# Altium PCB UKU205.PcbDoc (part 3 of 3)
Units mm, origin at the board's own origin, x right, y up, seen from the top; angles counter-clockwise.
Board outline 374.65 x 264.35 mm, 2 copper layers (Top Layer, Bottom Layer); 253 components, 433 nets, 927 pads, 929 vias.
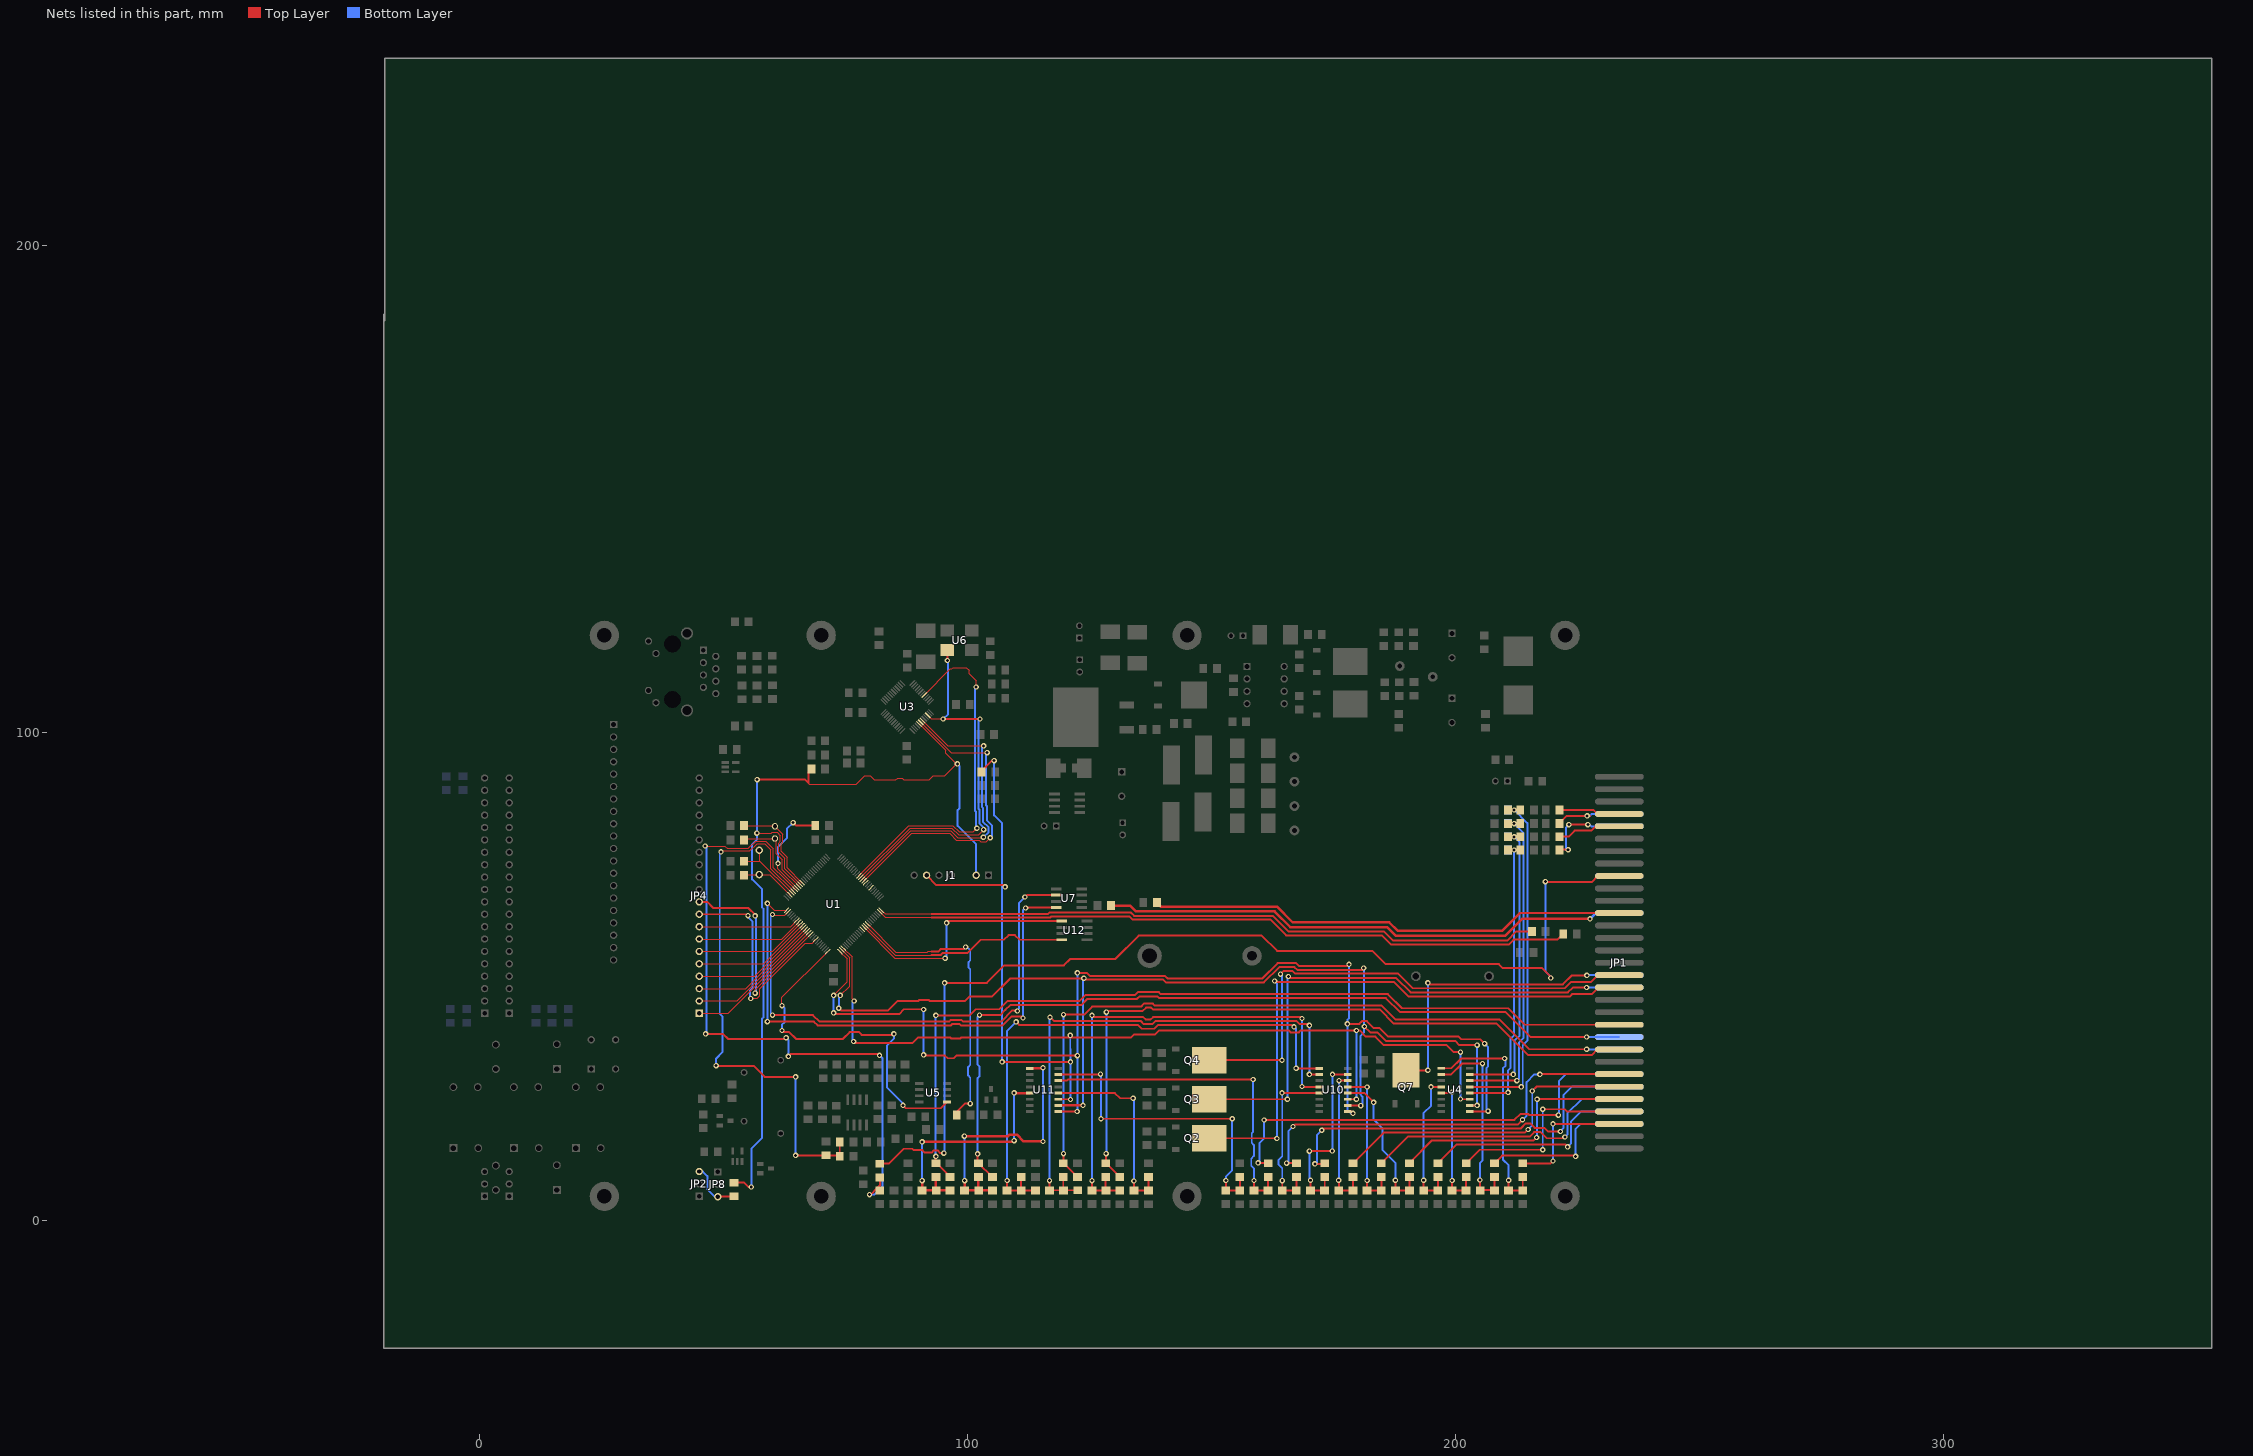
[diagram p3: the nets of this part, all layers, seen from the top]

## Via types
v1: diameter 1.1, hole 0.6, Top Layer to Bottom Layer, 928 vias
v2: diameter 3, hole 2, Top Layer to Bottom Layer, 1 vias

## Nets (pads, with @x,y where several pads share a name; then routed paths per layer and width w, separated by ;. In a path a pad name is that pad's centre, name@x,y a point inside that pad or via, vN(x,y) a via of type N, cw(c..) or ccw(c..) an arc to the next point about the centre after c; other vN are vias at no path point) (continued)
P1_14: U1.89 U3.41 | length 74.3
  Top Layer w0.25: U1.89@77.727,70.734 87.993,81 97,81 98.3,79.7 101.15,79.7 v1(101.9,80.45) ; U3.41@91.12,107.733 96.486,113.1 96.8,113.1 97.1,113.4 99.75,113.4 100.3,112.85 100.3,112.1 101.75,110.65 v1(101.75,109.4)
  Bottom Layer w0.4: v1(101.75,109.4) 101.5,109.15 101.5,84.05 101.7,83.85 101.7,80.65 v1(101.9,80.45)
P1_15: U1.88 U3.34 U6.3 | length 79.1
  Top Layer w0.25: U1.88@78.08,70.38 88.2,80.5 96.75,80.5 98.15,79.1 102.25,79.1 v1(103.3,80.15) ; U3.34@91.827,103.597 92.573,102.85 v1(95,102.85)
  Top Layer w0.4: v1@95.031,102.881 v1@102.481,102.881 ; v1(95.85,114.85) U6.3@95.85,116.9
  Bottom Layer w0.4: v1(95,102.85) 96,103.85 v1@96,114.85 ; v1(102.55,102.85) 102.25,102.55 102.25,84.4 102.4,84.25 102.4,81.5 103.3,80.6 v1(103.3,80.15)
P1_16: U1.87 U3.31 | length 64.1
  Top Layer w0.25: U1.87@78.434,70.026 88.357,79.95 96.55,79.95 97.95,78.55 103.2,78.55 v1(103.25,78.6) ; U3.31@90.766,102.536 95.952,97.35 v1(103.3,97.35)
  Bottom Layer w0.4: v1(103.25,78.6) 104.3,79.65 104.3,80.65 103.15,81.8 103.15,84.65 103,84.8 103,97.05 v1(103.3,97.35)
P1_17: U1.86 U3.30 | length 65.4
  Top Layer w0.25: U1.86@78.787,69.673 88.514,79.4 96.3,79.4 97.7,78 102.4,78 102.75,77.65 103.8,77.65 v1(104.65,78.5) ; U3.30@90.413,102.183 96.645,95.95 v1(104,95.95)
  Bottom Layer w0.4: v1(104,95.95) 103.75,95.7 103.75,85.2 103.95,85 103.95,82.05 105.05,80.95 105.05,78.9 v1(104.65,78.5)
P1_18: JP4.8 U1.32 | length 20.5
  Top Layer w0.25: JP4.8@45,60.28 63.737,60.28 U1.32@64.999,61.541
P1_19: JP4.7 U1.33 | length 21.8
  Top Layer w0.25: JP4.7@45,57.74 61.904,57.74 U1.33@65.352,61.188
P1_20: JP4.6 U1.34 | length 23
  Top Layer w0.25: JP4.6@45,55.2 60.072,55.2 U1.34@65.706,60.834
P1_21: JP4.5 U1.35 | length 24.3
  Top Layer w0.25: JP4.5@45,52.66 58.239,52.66 U1.35@66.059,60.481
P1_22: JP4.4 U1.36 | length 25.6
  Top Layer w0.25: JP4.4@45,50.12 56.406,50.12 U1.36@66.413,60.127
P1_23: JP4.3 U1.37 | length 26.8
  Top Layer w0.25: JP4.3@45,47.58 54.573,47.58 U1.37@66.766,59.773
P1_24: JP4.2 U1.38 | length 28.1
  Top Layer w0.25: JP4.2@45,45.04 52.74,45.04 U1.38@67.12,59.42
P1_25: JP4.1 U1.39 | length 29.3
  Top Layer w0.25: JP4.1@45,42.5 50.907,42.5 U1.39@67.473,59.066
P1_26: JP4.10 U1.40 | length 45.6
  Top Layer w0.25: v1(56.45,46.65) 56.45,47.336 U1.40@67.827,58.713 U1.40@67.827,58.677
  Top Layer w0.4: JP4.10@45,65.36 46.64,65.36 47.9,64.1 55.05,64.1 56.45,62.7 v1(56.45,62.5)
  Bottom Layer w0.4: v1(56.45,46.65) 56.65,46.85 56.65,62.3 v1(56.45,62.5)
P1_27: JP4.9 U1.43 | length 46.9
  Top Layer w0.25: v1(55.55,45.55) 55.65,45.65 56.9,45.65 57.4,46.15 57.4,47.55 66.75,56.9 68.136,56.9 U1.43@68.888,57.652
  Top Layer w0.4: JP4.9@45,62.82 54.73,62.82 v1(55,62.55)
  Bottom Layer w0.4: v1(55,62.55) 55,62.25 55.9,61.35 55.9,47.6 55.4,47.1 55.4,45.7 v1(55.55,45.55)
P1_30: C25.2 R66.2 R67.1 U1.21 | length 111.6
  Top Layer w0.25: v1(49.45,75.6) 49.65,75.8 55.4,75.8 56.85,77.25 58.45,77.25 59.7,76 59.7,72.143 U1.21@64.243,67.6
  Top Layer w0.4: v1(48.45,31.8) 48.5,31.75 56.15,31.75 58.4,29.5 v1(64.75,29.5) ; v1(64.75,13.4) 64.8,13.4 64.812,13.412 73.738,13.412 73.8,13.475 R66.2@73.8,16.2
  Bottom Layer w0.4: v1(48.45,31.8) 48.45,33.25 49.8,34.6 49.8,41.85 49.2,42.45 49.2,75.35 v1(49.45,75.6) ; v1(64.75,13.4) v1(64.75,29.5)
P1_31: R16.1 R25.1 U1.20 | length 139.4
  Top Layer w0.25: v1(46.2,76.8) 50.2,76.8 50.7,76.3 55.05,76.3 56.55,77.8 58.6,77.8 60.2,76.2 60.2,72.35 62.195,70.355 U1.20@64.645,67.905
  Top Layer w0.4: v1(46.3,38.3) 49.85,38.3 50.9,37.25 62.55,37.25 v1(62.8,37.5) ; v1(63.25,33.7) 63.75,34.2 81.65,34.2 v1(81.95,33.9) ; v1(79.9,5.35) 80.107,5.35 81.481,6.725 82.007,7.25 R25.1@82.007,8.888
  Bottom Layer w0.4: v1(46.2,76.8) 46.45,76.55 46.45,38.45 v1(46.3,38.3) ; v1(62.8,37.5) 63.25,37.05 v1(63.25,33.7) ; v1(79.9,5.35) 80.9,5.35 82.6,7.05 82.6,33.25 v1(81.95,33.9)
P2_0: R54.1 U1.75 | length 137
  Top Layer w0.25: U1.75@82.323,63.663 83.085,62.9 92.6,62.9
  Top Layer w0.4: 92.6,62.9 116.5,62.9 116.75,63.15 133.5,63.15 134.15,62.5 162.55,62.5 165.75,59.3 185.35,59.3 187.25,57.4 210.6,57.4 212.493,59.293 R54.1@215.688,59.293
P2_1: R55.1 U1.74 | length 144
  Top Layer w0.25: U1.74@81.969,63.309 83.078,62.2 92.65,62.2
  Top Layer w0.4: 92.65,62.2 117,62.2 117.2,62.4 133.15,62.4 133.85,61.7 162.1,61.7 165.3,58.5 184.9,58.5 186.8,56.6 210.95,56.6 211.95,57.6 220.894,57.6 R55.1@222.088,58.793
P2_6: R34.1 U1.67 | length 60.4
  Top Layer w0.25: U1.67@79.494,60.834 85.278,55.05 91.75,55.05 91.9,55.2 92.65,55.2
  Top Layer w0.4: 92.65,55.2 94.05,55.2 94.55,55.7 99.25,55.7 v1@99.75,56.2 ; R34.1@97.788,21.693 97.788,22.338 99.45,24 v1(100.55,24)
  Bottom Layer w0.4: v1@99.75,56.2 100.55,55.4 100.55,53.35 100.2,53 100.2,51.85 100.55,51.5 100.55,31.95 100.1,31.5 100.1,29.8 100.55,29.35 v1(100.55,24)
  other v1: 99.6,56.1
P2_7: U1.66 U12.4 | length 44.7
  Top Layer w0.25: U1.66@79.141,60.481 85.171,54.45 92.6,54.45 ; U1.66@79.15,60.5 U1.66@79.155,60.495
  Top Layer w0.4: 92.6,54.45 94.45,54.45 94.9,54.9 100,54.9 102.692,57.592 107.442,57.592 108.4,58.55 109.7,58.55 110.658,57.592 U12.4@119.289,57.592
P2_8: U1.65 U12.1 | length 50.4
  Top Layer w0.25: U1.65@78.773,60.127 U1.65@78.787,60.127 85.114,53.8 v1(95.4,53.8)
  Top Layer w0.4: v1(95.7,61.05) 95.7,61.15 95.952,61.402 U12.1@119.289,61.402
  Bottom Layer w0.4: v1(95.4,53.8) 95.45,53.8 95.7,54.05 v1(95.7,61.05)
P2_9: U1.64
P2_10: J1.6 R82.2 U1.53 U4.11 U10.11 U11.11 | length 289
  Top Layer w0.25: U1.53@74.545,55.884 76.35,54.079 76.35,45.45 v1(76.75,45.05)
  Top Layer w0.4: v1(76.65,36.75) 76.95,36.45 88.75,36.45 89.9,37.6 96.45,37.6 96.7,37.35 98.5,37.35 98.75,37.6 133.55,37.6 134.1,38.15 138.4,38.15 139.25,39 165.8,39 166.2,38.6 167.9,38.6 168.3,39 180.4,39 181.65,37.75 183.6,37.75 185.35,36 198.2,36 199.65,34.55 v1(201.05,34.55) ; J1.6@91.6,70.808 93.608,68.8 107.35,68.8 v1(107.7,68.45) ; R82.2@102.784,92.084 105,94.3 v1(105.45,94.3) ; v1(107.1,32.55) v1(121.1,32.55) ; U11.11@118.625,24.895 v1@121.055,24.895 ; U10.11@177.925,24.895 179.695,24.895 v1(179.7,24.9) ; v1(201.05,24.95) 201.098,24.902 U4.11@202.92,24.902
  Bottom Layer w0.4: v1(76.65,36.75) 76.4,37 76.4,44.7 v1(76.75,45.05) ; v1(105.45,94.3) 105.45,83.1 107.1,81.45 v1(107.1,32.55) ; 107.1,68.8 107.35,68.8 v1(107.7,68.45) ; v1(121.05,38) 121.071,32.55 v1(121.1,24.85) ; v1(179.7,24.9) v1(179.7,39) ; v1(201.05,24.95) v1(201.05,34.55)
P2_11: U1.52 U4.10 U10.10 U11.10 | length 227.3
  Top Layer w0.25: v1(73.9,46.2) 75.8,48.1 75.8,53.922 U1.52@74.191,55.531
  Top Layer w0.4: v1(73.6,43.55) 74.05,43.1 83.7,43.1 85.6,45 89.85,45 90.05,45.2 92.05,45.2 92.25,45 99.45,45 100.45,46 105.05,46 108.7,49.65 123.5,49.65 123.75,49.4 140.1,49.4 140.65,48.85 160.75,48.85 163.9,52 167,52 167.6,51.4 181,51.4 v1@181.25,51.65 ; U10.10@177.95,23.65 178,23.6 v1(180.6,23.6) ; v1(181.35,39.8) 182.55,38.6 184,38.6 185.75,36.85 199.95,36.85 200.8,36 v1(204.45,36) ; U4.10@202.92,23.632 204.432,23.632 v1(204.45,23.65)
  Top Layer w0.5: U11.10@118.625,23.625 123.625,23.625 v1(123.65,23.65)
  Bottom Layer w0.4: v1(73.6,43.55) 73.6,45.9 v1(73.9,46.2) ; v1(123.65,23.65) 123.65,49.5 v1(123.85,49.7) ; v1(180.6,23.6) 180.95,23.95 180.95,25.45 180.5,25.9 180.5,37.85 180.607,37.957 181.234,38.584 v1@181.234,51.65 ; v1(204.45,23.65) v1(204.45,36)
  other v1: 181.2,51.8
P2_12: U1.51 U4.9 U10.9 U11.9 | length 245.9
  Top Layer w0.25: v1(72.55,46.2) 75.3,48.95 75.3,53.715 U1.51@73.837,55.177
  Top Layer w0.4: v1(72.55,42.6) 72.8,42.35 85.95,42.35 86.95,43.35 90.95,43.35 v1(91,43.3) ; v1(91,34) 91.15,33.85 95.35,33.85 95.9,33.3 97.15,33.3 97.7,33.85 v1(122.5,33.85) ; U11.9@118.625,22.35 v1@122.4,22.35 ; v1(122.5,50.8) 124.45,50.8 125.1,50.15 140.5,50.15 141,49.65 160.4,49.65 163.55,52.8 167.35,52.8 167.95,52.2 177.85,52.2 v1(178.2,52.55) ; v1(177.85,40.35) 180.3,40.35 180.85,40.9 181.85,40.9 183.25,39.5 184.45,39.5 186.2,37.75 200.65,37.75 201.2,37.2 205.1,37.2 v1(206,36.3) ; U10.9@177.925,22.355 178.645,22.355 v1(179,22) ; U4.9@202.92,22.362 206.612,22.362 v1(206.7,22.45)
  Bottom Layer w0.4: v1(72.55,42.6) v1(72.55,46.2) ; v1(91,34) v1(91,43.3) ; v1@122.5,22.45 v1(122.5,50.8) ; 178.2,41.4 v1(178.2,52.55) ; 178.2,41.5 177.85,41.15 177.85,22.7 178.55,22 v1(179,22) ; v1(206,36.3) 206.7,35.6 206.7,31.65 206.35,31.3 206.35,22.8 v1(206.7,22.45)
  other v1: 122.45,22.4
P2_13: U1.50 U5.1 | length 71.5
  Top Layer w0.25: v1(61.95,44.1) 61.95,45.765 U1.50@71.363,55.177
  Top Layer w0.4: v1(61.95,39) 62,39 62.35,38.65 63.45,38.65 64.85,37.25 74.4,37.25 75.8,38.65 77.75,38.65 78.3,38.1 84.7,38.1 v1(84.9,38.3) ; v1(86.75,23.65) 87.35,23.05 94.506,23.05 U5.1@95.796,24.34
  Bottom Layer w0.4: v1(61.95,39) 61.95,40.15 62.5,40.7 62.5,43.55 v1(61.95,44.1) ; v1(84.9,38.3) 84.9,37.3 83.45,35.85 83.45,27.35 86.75,24.05 v1(86.75,23.65)
P3_25: U1.27 U7.2 | length 107.1
  Top Layer w0.25: v1@59.95,62.85 60.2,62.6 62.522,62.6 U1.27@63.231,63.309
  Top Layer w0.4: v1@59.9,42.15 68.3,42.15 69.65,40.8 96.2,40.8 96.55,41.15 98.75,41.15 99.1,40.8 106.9,40.8 109.2,43.1 110.05,43.1 v1@110.2,43.25 ; v1(111.75,66.35) 112.132,66.732 U7.2@118.189,66.732
  Bottom Layer w0.4: v1@59.9,42.15 59.65,42.4 59.65,62.55 v1@59.95,62.85 ; v1@110.2,43.25 110.55,43.6 110.55,65.15 v1(111.75,66.35)
  other v1: 60,42.15 110.2,43 60.021,62.779
P3_26: U1.26 U7.4 | length 111.8
  Top Layer w0.25: v1(58.95,65.05) 60.337,63.663 U1.26@62.877,63.663
  Top Layer w0.4: v1(58.95,40.8) 68.5,40.8 69.25,40.05 96.6,40.05 96.9,40.35 98.3,40.35 98.6,40.05 107.2,40.05 109.05,41.9 111,41.9 v1(111.35,41.55) ; v1(111.9,64.1) 111.992,64.192 U7.4@118.189,64.192
  Bottom Layer w0.4: v1(58.95,40.8) v1(58.95,65.05) ; v1(111.35,41.55) 111.35,63.65 111.8,64.1 v1(111.9,64.1)
P4_28: U1.82
P4_29: U1.85
PROG_RESET: 
PROG_SET: 
PWM1: JP1.23 R40.1 | length 98.7
  Top Layer w0.5: R40.1@138.812,65.207 139.619,64.4 163.4,64.4 166.65,61.15 186.45,61.15 188.2,59.4 209.55,59.4 213.225,63.075 JP1.23@233.589,63.075
PWM2: JP1.24 R41.1 | length 108.8
  Top Layer w0.5: R41.1@129.412,64.607 133.293,64.607 134.5,63.4 162.95,63.4 166.15,60.2 186,60.2 187.8,58.4 210.2,58.4 213.675,61.875 v1(227.589,61.875)
  Bottom Layer w0.5: v1(227.589,61.875) 228.814,63.099 JP1.24@233.679,63.099
R1: JP1.35 Q2.4 | length 119.2
  Top Layer w0.4: Q2.4@149.521,16.903 149.524,16.9 163.4,16.9 163.45,16.85 v1(163.4,16.85) ; v1(162.95,49.15) 163,49.1 163.05,49.1 163.25,48.9 187.45,48.9 190.4,45.95 223.45,45.95 224,46.5 228.05,46.5 229.375,47.825 JP1.35@233.589,47.825
  Bottom Layer w0.4: v1(162.95,49.15) 163.4,48.7 v1(163.4,16.85)
R2: JP1.36 Q3.4 | length 111.3
  Top Layer w0.4: Q3.4@149.521,24.903 157.597,24.903 157.6,24.9 v1(165.55,24.9) ; v1(165.75,50.05) 166.05,49.75 187.85,49.75 190.8,46.8 223.05,46.8 224.05,47.8 v1(226.9,47.8)
  Bottom Layer w0.4: v1(165.55,24.9) v1@165.55,50.05 ; v1@165.55,50.25 v1(165.75,50.05) v1@165.75,50.3 ; v1(226.9,47.8) 226.925,47.825 JP1.36@233.589,47.825
R3: JP1.33 Q4.4 | length 105.3
  Top Layer w0.4: Q4.4@149.521,32.903 156.547,32.903 156.55,32.9 v1(164.45,32.9) ; v1(164.15,50.55) 164.15,50.5 164.85,51.2 166.6,51.2 167.15,50.65 188.25,50.65 191.25,47.65 222.45,47.65 223.75,48.95 227.8,48.95 229.2,50.35 JP1.33@233.589,50.35 ; JP1.33@233.589,50.35 JP1.33@233.8,50.35
  Bottom Layer w0.4: v1(164.15,50.55) 164.45,50.25 v1(164.45,32.9)
R4: JP1.34 Q7.4 | length 62.5
  Top Layer w0.4: Q7.4@189.897,30.821 194.321,30.821 v1(194.35,30.85) ; v1(194.35,48.75) 194.65,48.45 222.05,48.45 223.9,50.3 v1(226.95,50.3)
  Bottom Layer w0.4: v1(194.35,30.85) v1(194.35,48.75) ; v1(226.95,50.3) 226.975,50.325 JP1.34@233.589,50.325
RES: D2.1 J1.2 R81.1 U1.17 U3.29 | length 190.4
  Top Layer w0.25: v1@56.75,79.45 v1(56.8,79.45) ; v1@56.75,79.5 v1(56.8,79.45) ; U1.17@65.706,68.966 62.55,72.122 62.55,74.25 61.25,75.55 61.25,77.35 61.65,77.75 61.65,78.95 60.95,79.65 60,79.65 59.8,79.45 v1(56.8,79.45) ; 67.35,89.75 67.35,89.7 67.55,89.5 77.2,89.5 78.9,91.2 80.05,91.2 80.85,90.4 85.3,90.4 85.65,90.75 86.6,90.75 86.95,90.4 92.15,90.4 93,91.25 95.3,91.25 97.45,93.4 97.45,93.9 95.5,95.85 95.5,96.388 U3.29@90.059,101.829 ; v1@97.45,93.6 v1@97.85,93.6
  Top Layer w0.4: D2.1@52.109,7.795 54.205,7.795 55.1,6.9 v1(55.65,6.9) ; v1(56.85,90.4) 66.7,90.4 67.35,89.75 67.35,91.956 R81.1@67.988,92.593
  Bottom Layer w0.4: v1(55.65,6.9) 55.7,6.95 55.7,14.75 57.85,16.9 57.85,41.4 58.2,41.75 58.2,63.9 57.9,64.2 57.9,67.9 55.85,69.95 55.85,77.15 56.8,78.1 v1@56.8,90.35 ; v1(97.9,93.65) 98.3,93.25 98.3,84.5 97.95,84.15 97.95,80.95 101.76,77.14 J1.2@101.76,70.808
RES_BUT: D2.2 JP2.3 JP8.3 | length 10.9
  Top Layer w0.4: JP8.3@48.8,4.92 52.034,4.92 D2.2@52.109,4.995
  Bottom Layer w0.4: JP2.3@45,10.08 45.72,10.08 46.65,9.15 46.65,6.45 48.18,4.92 JP8.3@48.8,4.92
RTCX1: C40.2 U1.16 Y2.1 | length 20.7
  Top Layer w0.25: C40.2@54.188,80.993 60.36,80.993 Y2.1@60.505,80.849 62.1,79.253 62.1,77.45 ; Y2.1@60.503,80.75 Y2.1@60.601,80.849 ; 62.1,77.55 61.8,77.25 61.8,75.75 63.05,74.5 63.05,72.329 U1.16@66.059,69.319
RTCX2: C41.2 U1.18 Y2.2 | length 18
  Top Layer w0.25: C41.2@54.25,78.25 54.349,78.349 Y2.2@60.505,78.349 60.8,78.053 60.8,75.2 62.05,73.95 62.05,71.953 65.352,68.651 U1.18@65.352,68.612
RX0: 
SK1: JP1.7 R92.1 | length 12.5
  Top Layer w0.4: R92.1@221.309,84.214 228.236,84.214 229.05,83.4 JP1.7@233.45,83.4
SK2: JP1.8 R94.1 | length 13.1
  Top Layer w0.4: R94.1@221.3,81.45 222.85,83 227.6,83
  Bottom Layer w0.4: 227.6,83 227.975,83.375 JP1.8@233.589,83.375
  other v1: 227,83
SK3: JP1.9 R96.1 | length 13.2
  Top Layer w0.4: R96.1@221.309,78.714 223.214,78.714 224.45,79.95 227.85,79.95 228.75,80.85 JP1.9@233.589,80.85
SK4: JP1.10 R98.1 | length 17.3
  Top Layer w0.4: R98.1@221.3,76.05 222.55,76.05 v1@222.6,76 ; v1(223.25,81.2) v1@227.5,81.2
  Bottom Layer w0.4: v1@222.6,76 222.55,76 222.575,76.025 222.65,76.1 222.65,80.6 v1(223.25,81.2) ; v1@227.5,81.2 227.85,80.85 JP1.10@233.589,80.85
  other v1: 223.1,76.05 227.15,81.2
T1: JP1.45 R8.2 R17.1 | length 144.6
  Top Layer w0.4: v1@128.4,13.4 128.4,11.75 R17.1@131.15,9 ; v1@128.4,43 135.9,43 136.6,43.7 137.6,43.7 138,43.3 184.5,43.3 187.4,40.4 208.45,40.4 214.9,33.95 227.9,33.95 229.05,35.1 JP1.45@233.589,35.1
  Bottom Layer w0.4: v1(128.4,13.75) 128.45,13.8 v1(128.45,42.75)
T2: JP1.46 R9.2 R18.1 | length 153.4
  Top Layer w0.4: v1@119.65,13.55 119.65,11.65 119.8,11.65 R18.1@122.55,8.9 ; v1(119.65,42.25) 123.9,42.25 125.55,43.9 135.55,43.9 136.15,44.5 138,44.5 138.4,44.1 184.9,44.1 187.8,41.2 209.05,41.2 215.1,35.15 v1(226.9,35.15)
  Bottom Layer w0.4: v1@119.65,13.55 v1(119.65,42.25) ; v1@226.9,35.1 v1(226.9,35.15) ; v1@226.9,35.1 JP1.46@233.589,35.1
  other v1: 119.65,13.75
T3: JP1.43 R11.2 R19.1 | length 161.1
  Top Layer w0.4: R11.2@110.95,11.8 111.05,11.8 R19.1@113.9,8.95 ; R11.2@111.014,11.791 111.014,13.464 v1@111.05,13.5 ; v1@112.8,41.5 114.95,41.5 116.85,43.4 123.7,43.4 124.95,44.65 135.15,44.65 135.7,45.2 138.5,45.2 138.8,44.9 185.35,44.9 188.25,42 209.8,42 215.45,36.35 227.9,36.35 229.2,37.65 JP1.43@233.589,37.65
  Bottom Layer w0.4: v1@111.05,13.5 111.05,38.75 112.5,40.2 112.5,41.2 v1@112.8,41.5
  other v1: 111.05,13.7 112.9,41.4
T3: 
T3: 
T3: 
T4: JP1.44 R115.1 R119.2 | length 171.2
  Top Layer w0.4: v1@102.05,13.4 102.05,11.9 102.15,11.8 102.187,11.763 R119.2@102.25,11.7 ; R119.2@102.214,11.791 105.014,8.991 R115.1@105.114,8.991 ; v1(102.45,42.15) 106.7,42.15 107.75,43.2 108.75,44.2 123.3,44.2 124.55,45.45 134.7,45.45 135.25,46 138.9,46 139.25,45.65 185.75,45.65 188.65,42.75 210.3,42.75 215.4,37.65 v1(226.9,37.65)
  Bottom Layer w0.4: v1@102.05,13.4 102.05,29.25 102.4,29.6 102.4,31.65 102.05,32 102.05,41.75 v1(102.45,42.15) ; v1(226.9,37.65) JP1.44@233.589,37.65
  other v1: 102.05,13.7
T5: JP1.41 R116.1 R120.2 | length 179.3
  Top Layer w0.4: v1@93.4,13.45 93.45,13.4 93.45,11.75 93.656,11.75 R116.1@96.414,8.991 ; v1(93.5,42.1) 100.4,42.1 101.65,43.35 106.5,43.35 108.15,45 122.9,45 124.15,46.25 134.3,46.25 134.9,46.85 139.2,46.85 139.6,46.45 186.15,46.45 189.05,43.55 210.8,43.55 214.175,40.175 JP1.41@233.589,40.175
  Bottom Layer w0.4: v1@93.4,13.45 93.4,42 v1(93.5,42.1)
  other v1: 93.5,13.2
TD1: 
TX0: 
TX0: 
TX0: 
TX0: 
TX0: 
TX0: 
TX0: 
TX0: 
TX0: 
TX0: 
TX0: 
TX0: 
TX0: 
TX0: 
TX0: 
TX0: 
TX0: 
TX0: 
TX0: 
TX0: 
TX0: 
TX0: 
TX0: 
TX0: 
TX0: 
TX0: 
TX0: 
TX0: 
TX0: 
TX0: 
TX0: 
TX0: 
TX0: 
TX0: 
TX0: 
TX0: 
TX0: 
TX0: 
TX0: 
TX0: 
TX0: 
TX0: 
TX0: 
TX0: 
TX0: 
TX0: 
TX0: 
TX0: 
TX0: 
TX0: 
TX0: 
TX0: 
TX0: 
TX0: 
TX0: 
TX0: 
TX0: 
TX0: 
TX0: 
TX0: 
TX0: 
TX0: 
TX0: 
TX0: 
TX0: 
TX0: 
TX0: 
TX0: 
TX0: 
TX0: 
TX0: 
TX0: 
TX0: 
TX0: 
TX0: 
TX0: 
TX0: 
TX0: 
TX0: 
TX0: 
TX0: 
TX0: 
TX0: 
TX0: 
TX0: 
TX0: 
TX0: 
TX0: 
TX0: 
TX0: 
TX0: 
U1: JP1.57 R20.2 | length 27.7
  Top Layer w0.4: R20.2@213.75,11.7 219.45,11.7 v1(220,12.25) ; v1(220,19.85) JP1.57@233.589,19.85
  Bottom Layer w0.4: v1(220,12.25) v1(220,19.85)
U2: 
U2: 
U2: 
U2: 
U2: 
U2: 
U2: 
U2: 
U2: 
U2: JP1.58 R21.2 | length 32.4
  Top Layer w0.4: R21.2@208.007,11.788 209.569,13.35 224.5,13.35 v1(224.65,13.2)
  Bottom Layer w0.4: v1(224.65,13.2) 224.65,18.85 225.65,19.85 JP1.58@233.589,19.85
U3: JP1.55 R22.2 | length 41
  Top Layer w0.4: R22.2@202.207,11.788 204.969,14.55 v1(217.9,14.55) ; v1(217.9,22.85) 222.4,22.85 222.85,22.4 JP1.55@233.589,22.4
  Bottom Layer w0.4: v1(217.9,14.55) v1(217.9,22.85)
U4: JP1.56 R83.2 | length 44.6
  Top Layer w0.4: R83.2@196.4,11.8 200.2,15.6 222.55,15.6 v1(223,15.15)
  Bottom Layer w0.4: v1(223,15.15) 223.7,15.85 223.7,20.35 225.75,22.4 JP1.56@233.589,22.4
U5: JP1.53 R84.2 | length 52.9
  Top Layer w0.4: R84.2@190.6,11.85 195.2,16.45 216.05,16.45 v1(216.65,17.05) ; v1(216.75,24.9) 216.775,24.925 JP1.53@233.589,24.925
  Bottom Layer w0.4: v1(216.65,17.05) 216.75,17.15 v1(216.75,24.9)
U6: JP1.54 R85.2 | length 57.8
  Top Layer w0.4: R85.2@184.814,11.791 190.273,17.25 215.25,17.25 216.15,18.15 217.45,18.15 218.7,16.9 222.2,16.9 v1(222.45,17.15)
  Bottom Layer w0.4: v1(222.45,17.15) 222.95,17.65 222.95,22 225.875,24.925 JP1.54@233.589,24.925
U7: JP1.51 R86.2 | length 65.2
  Top Layer w0.4: R86.2@179.014,11.791 185.273,18.05 214.25,18.05 v1(214.9,18.7) ; v1(215.75,26.6) 216.625,27.475 JP1.51@233.589,27.475
  Bottom Layer w0.4: v1(214.9,18.7) 215.75,19.55 v1(215.75,26.6)
U8: JP1.52 R87.2 | length 79
  Top Layer w0.4: v1@171.65,11.65 173.073,11.65 R87.2@173.214,11.791 ; v1(172.6,18.55) 172.6,18.65 172.85,18.9 213.4,18.9 214.45,19.95 215.35,19.95 216.25,19.05 218.2,19.05 218.95,18.3 v1(221.5,18.3)
  Bottom Layer w0.4: v1@171.65,11.65 171.65,17.6 v1(172.6,18.55) ; v1(221.5,18.3) 222.15,18.95 222.15,25.75 223.875,27.475 JP1.52@233.589,27.475
  other v1: 171.2,11.65
U9: JP1.49 R88.2 | length 84.9
  Top Layer w0.4: v1@165.75,11.8 165.759,11.791 R88.2@167.414,11.791 ; v1(166.7,19.3) 167.1,19.7 212.75,19.7 v1(213.75,20.7) ; v1(217.3,30) 217.35,30.05 JP1.49@233.589,30.05
  Bottom Layer w0.4: v1@165.75,11.8 165.75,18.35 v1(166.7,19.3) ; v1(213.75,20.7) 214.6,21.55 214.6,28.4 216.2,30 v1(217.3,30)
  other v1: 165.4,11.8
U10: JP1.50 R91.2 | length 92
  Top Layer w0.4: v1@159.85,11.85 159.909,11.791 R91.2@161.614,11.791 ; v1(160.8,20.65) 212.1,20.65 213.35,21.9 214.9,21.9 215.15,21.65 v1(221.1,21.65) ; R91.2@161.55,11.7 R91.2@161.628,11.778
  Bottom Layer w0.4: v1@159.85,11.85 159.85,15.95 160.8,16.9 v1(160.8,20.65) ; v1(221.1,21.65) 221.2,21.75 221.2,28.6 222.65,30.05 JP1.50@233.589,30.05
  other v1: 159.55,11.85
UAKB: 
UAKB: 
UAKB: 
UAKB: 
UAKB: 
UAKB: 
UAKB: 
UAKB: 
UAKB: 
UAKB: 
UAKB: 
UAKB: 
UAKB: 
UAKB: 
UAKB: 
UAKB: 
UAKB: 
UAKB: 
UAKB: 
UAKB: 
UAKB: 
UAKB: 
UAKB: 
UAKB: 
UAKB: 
UAKB: 
UAKB: 
UAKB: 
UI1: C4.1 R6.1 R23.2 U11.15 | length 65.7
  Top Layer w0.4: U11.15@118.625,29.975 127.175,29.975 v1(127.25,30.05) ; v1(127.35,20.9) v1(154.25,20.9) ; v1@152.95,8.05 152.95,6.2 152.932,6.2 152.919,6.188 R23.2@155.807,6.188 R6.1@155.807,8.988
  Bottom Layer w0.4: v1(127.25,30.05) 127.35,29.95 v1(127.35,20.9) ; v1@152.95,8.05 152.95,9 154.25,10.3 v1(154.25,20.9)
  other v1: 152.95,8.25
UI2: C5.1 R7.1 R24.2 U11.12 | length 40.5
  Top Layer w0.4: U11.12@118.625,26.165 130.185,26.165 131.25,25.1 v1(133.95,25.1) ; v1@134.1,8 134.102,7.998 C5.1@134.102,6.205 134.119,6.188 R24.2@137.107,6.188 R7.1@137.107,8.988
  Bottom Layer w0.4: v1(133.95,25.1) 134.1,24.95 v1@134.1,8
  other v1: 134.1,8.15
US: JP1.17 R25.2 | length 218.1
  Top Layer w0.4: R25.2@82.007,11.688 83.838,11.688 86.9,14.75 88.7,14.75 89,14.45 90.75,14.45 91.25,13.95 92.65,13.95 93.1,14.4 93.85,14.4 94.4,13.85 v1(95.15,13.85) ; v1(95.3,48.75) 103.95,48.75 107.55,52.35 119.75,52.35 121.05,53.65 130.25,53.65 135.05,58.45 160.3,58.45 163.45,55.3 183,55.3 185.7,52.6 208.9,52.6 209.7,51.8 217.8,51.8 219.55,50.05 v1(219.55,49.75) ; v1(218.45,69.5) 218.55,69.4 227.95,69.4 229.225,70.675 JP1.17@233.589,70.675
  Bottom Layer w0.4: v1(95.15,13.85) 95.3,14 v1(95.3,48.75) ; v1(218.45,69.5) 218.45,51.15 219.55,50.05 v1(219.55,49.75)
US1: 
US1: 
US1: 
US1: 
US1: 
US1: 
US1: 
US1: 
US1: 
US1: 
US1: 
US1: 
US1: 
US1: 
US1: 
US1: 
US1: 
US1: 
US1: 
US1: 
US1: 
US1: 
US1: 
US1: 
US1: 
US1: 
US1: 
US1: 
US1: 
US1: 
US1: 
US1: 
USK1: C50.1 R93.2 R111.2 U4.13 | length 72.7
  Top Layer w0.4: U4.13@202.92,27.442 213.492,27.442 v1(213.5,27.45) ; R111.2@210.85,84.2 210.864,84.214 R93.2@213.309,84.214
  Bottom Layer w0.4: C50.1@210.791,84.186 212.036,84.186 v1(212.05,84.2) 214.75,81.5 214.75,36.9 213.8,35.95 213.8,27.75 v1(213.5,27.45)
USK2: C51.1 R95.2 R112.2 U4.14 | length 67.5
  Top Layer w0.4: U4.14@202.92,28.712 202.932,28.7 v1(212.6,28.7) ; R112.2@210.791,81.386 210.82,81.414 R95.2@213.309,81.414
  Bottom Layer w0.4: C51.1@210.791,81.386 212.036,81.386 v1(212.05,81.4) 213.95,79.5 213.95,37.45 213.05,36.55 213.05,29.15 v1(212.6,28.7)
USK3: C52.1 R97.2 R113.2 U4.15 | length 62.4
  Top Layer w0.4: U4.15@202.92,29.982 202.938,30 v1(211.85,30) ; R113.2@210.791,78.686 210.82,78.714 R97.2@213.309,78.714
  Bottom Layer w0.4: C52.1@210.791,78.686 212.036,78.686 v1(212.05,78.7) 213.15,77.6 213.15,37.95 212.15,36.95 212.15,30.35 211.85,30.05 v1(211.85,30)
USK4: C53.1 R99.2 R114.2 U4.12 | length 61.9
  Top Layer w0.4: U4.12@202.922,26.172 210.672,26.172 v1(210.8,26.3) ; R114.2@210.791,75.986 210.82,76.014 R99.2@213.309,76.014
  Bottom Layer w0.4: C53.1@210.791,75.986 212.036,75.986 v1(212.05,76) 212.036,38.036 211.25,37.25 211.25,31.25 210.8,30.8 v1(210.8,26.3)
UT1: C6.1 D3.2 R8.1 R26.2 U10.4 | length 105.6
  Top Layer w0.4: C6.1@125.494,6.205 125.494,7.994 v1@125.5,8 ; v1(125.5,42.1) 125.85,41.75 136,41.75 136.5,41.25 137.55,41.25 138.05,41.75 168.25,41.75 v1(168.55,41.45) ; C6.1@125.55,6.2 125.559,6.191 R26.2@131.214,6.191 ; R8.1@128.314,8.991 128.314,6.227 D3.2@128.35,6.191 ; v1(168.55,27.5) 168.615,27.435 U10.4@172.075,27.435
  Bottom Layer w0.4: v1@125.5,8 v1(125.5,42.1) ; v1(168.55,27.5) v1(168.55,41.45)
  other v1: 125.5,8.2
UT2: C7.1 D4.2 R9.1 R27.2 U10.2 | length 110.8
  Top Layer w0.4: C7.1@116.75,6.25 116.759,6.241 R27.2@122.564,6.241 ; C7.1@116.794,6.205 116.794,7.744 116.8,7.75 v1@116.8,7.85 ; v1@116.8,41.85 117.7,40.95 135.45,40.95 136.1,40.3 137.9,40.3 138.55,40.95 167.4,40.95 168,40.35 169.75,40.35 v1(170.05,40.05) ; D4.2@119.6,6.3 119.614,6.314 R9.1@119.614,8.991 ; v1(170.05,30) 170.075,29.975 U10.2@172.075,29.975
  Bottom Layer w0.4: v1@116.8,7.85 v1@116.8,41.85 ; v1(170.05,30) v1(170.05,40.05)
  other v1: 116.8,8.2 116.9,41.7
UT3: C8.1 D5.2 R11.1 R28.2 U10.1 | length 115.3
  Top Layer w0.4: v1@108.1,8.1 108.1,6.223 108.1,6.2 R28.2@113.8,6.2 ; v1(109.95,40.75) 110.55,40.15 134.9,40.15 135.7,39.35 138.3,39.35 139.1,40.15 166.5,40.15 v1(166.9,39.75) ; D5.2@110.983,6.197 110.983,8.96 R11.1@111.014,8.991 ; v1(167.35,31.25) 167.355,31.245 U10.1@172.075,31.245
  Bottom Layer w0.4: v1@108.1,8.1 108.1,38.9 v1(109.95,40.75) ; v1(166.9,39.75) 167.35,39.3 v1(167.35,31.25)
  other v1: 108.1,8.25
UT4: C54.1 D1.2 R117.2 R119.1 U11.1 | length 54.3
  Top Layer w0.5: v1(99.35,17.35) 108.3,17.35 108.6,17.65 110.1,17.65 111.5,16.25 v1(115.45,16.25) ; C54.1@99.386,6.209 105.109,6.209 R117.2@105.15,6.25 ; C54.1@99.4,6.209 v1@99.4,8.05 ; R119.1@102.214,8.991 102.214,6.286 D1.2@102.25,6.25 ; U11.1@112.775,31.245 115.345,31.245 v1(115.45,31.35)
  Bottom Layer w0.4: v1(99.35,17.35) 99.4,17.3 v1@99.4,8.05 ; v1(115.45,16.25) v1(115.45,31.35)
  other v1: 99.4,8.2
UT5: C55.1 D8.2 R118.2 R120.1 U11.5 | length 50.6
  Top Layer w0.5: v1(90.7,8.2) 90.7,8.15 90.686,8.136 C55.1@90.686,6.209 96.541,6.209 R118.2@96.55,6.2 ; v1(90.7,16.15) 109.3,16.15 v1(109.55,16.4) ; R120.1@93.514,8.991 93.514,6.266 D8.2@93.583,6.197 ; v1(109.55,26.2) 109.585,26.165 U11.5@112.775,26.165
  Bottom Layer w0.4: v1(90.7,8.2) v1(90.7,16.15) ; v1(109.55,16.4) v1(109.55,26.2)
UU1: C1.1 R12.1 R20.1 U4.1 | length 47.4
  Top Layer w0.4: U4.1@197.07,31.252 199.152,31.252 201.15,33.25 v1(210.1,33.25) ; v1@210.9,8.05 210.9,6.207 C1.1@210.902,6.205 210.907,6.2 213.85,6.2 213.807,6.243 R20.1@213.807,8.988
  Bottom Layer w0.4: v1(210.1,33.25) 210.3,33.05 210.3,31.8 209.75,31.25 209.75,12.55 210.9,11.4 v1@210.9,8.05
  other v1: 210.9,8.3
UU2: C2.1 R13.1 R21.1 U4.2 | length 41.4
  Top Layer w0.4: U4.2@197.07,29.982 199.132,29.982 201.35,32.2 v1(205.55,32.2) ; v1@205,8 205,6.2 205.05,6.25 208,6.25 208.007,6.257 R21.1@208.007,8.988
  Bottom Layer w0.4: v1@205,8 205,11.75 205.55,12.3 v1(205.55,32.2)
  other v1: 205,8.35
UU3: C3.1 R15.1 R22.1 U4.5 | length 28.2
  Top Layer w0.4: U4.5@197.07,26.172 199.172,26.172 v1(199.3,26.3) ; v1@199.35,8 199.323,7.973 199.323,6.226 202.207,6.226 R22.1@202.207,8.988
  Bottom Layer w0.4: v1(199.3,26.3) 199.323,26.277 v1@199.323,7.973 ; v1@199.35,8 v1@199.45,8.1
  other v1: 199.323,8.25
UU4: C43.1 R10.1 R83.1 U4.4 | length 29.7
  Top Layer w0.4: v1@193.5,8.05 193.5,6.15 193.559,6.209 R10.1@196.386,6.209 196.414,6.238 R83.1@196.414,8.991 ; v1(195,27.45) 197.062,27.45 U4.4@197.07,27.442
  Bottom Layer w0.4: v1@193.5,8.05 193.5,22.1 195,23.6 v1(195,27.45)
  other v1: 193.5,8.3
UU5: C44.1 R14.1 R84.1 U10.12 | length 31.8
  Top Layer w0.4: U10.12@177.96,26.2 U10.12@177.925,26.165 177.94,26.15 181.4,26.15 183.25,24.3 v1(183.25,24.25) ; v1@187.7,8.05 C44.1@187.7,6.2 190.577,6.2 190.614,6.238 R84.1@190.614,8.991
  Bottom Layer w0.4: v1(183.25,24.25) 183.25,20.75 185.05,18.95 185.05,14.5 187.7,11.85 v1@187.7,8.05
  other v1: 187.7,8.3
UU6: C45.1 R74.1 R85.1 U10.13 | length 30.9
  Top Layer w0.4: U10.13@177.925,27.435 181.865,27.435 v1(181.9,27.4) ; v1@181.9,8.05 C45.1@181.9,6.2 184.8,6.2 184.814,6.214 R85.1@184.814,8.991
  Bottom Layer w0.4: v1@181.9,8.05 v1(181.9,27.4)
  other v1: 181.9,8.25
UU7: C46.1 R75.1 R86.1 U10.14 | length 30
  Top Layer w0.4: v1@176.1,8.05 C46.1@176.1,6.2 178.977,6.2 R75.1@178.986,6.209 179.014,6.238 R86.1@179.014,8.991 ; v1(176.15,28.7) 176.155,28.705 U10.14@177.925,28.705
  Bottom Layer w0.4: v1@176.1,8.05 176.1,28.65 v1(176.15,28.7)
  other v1: 176.05,8.3
UU8: C47.1 R76.1 R87.1 U10.15 | length 37.5
  Top Layer w0.4: v1(170.05,14.25) 170,14.25 170.05,14.3 v1(174.75,14.3) ; v1@170.3,8.05 C47.1@170.3,6.2 170.338,6.238 173.214,6.238 R87.1@173.214,8.991 ; v1(174.8,30) U10.15@177.9,30
  Bottom Layer w0.4: v1(170.05,14.25) 170.05,8.3 v1@170.3,8.05 ; v1(174.75,14.3) 174.8,14.35 v1(174.8,30)
  other v1: 170.3,8.3
UU9: C48.1 R77.1 R88.1 U10.5 | length 34
  Top Layer w0.4: v1(164.45,26.2) 164.485,26.165 U10.5@172.075,26.165 ; v1@164.5,8 C48.1@164.5,6.2 164.509,6.209 R77.1@167.386,6.209 ; R88.1@167.414,8.991 167.414,6.236 R77.1@167.45,6.2
  Bottom Layer w0.4: v1(164.45,26.2) 164.5,26.15 164.5,13.2 163.75,12.45 163.75,11.5 164.5,10.75 v1@164.5,8
  other v1: 164.5,8.2
UU10: C49.1 R78.1 R91.1 U11.14 | length 69.2
  Top Layer w0.4: U11.14@118.625,28.705 120.355,28.705 120.6,28.95 v1(158.55,28.95) ; v1@158.7,7.95 C49.1@158.7,6.2 158.738,6.238 161.614,6.238 R91.1@161.614,8.991
  Bottom Layer w0.4: v1(158.55,28.95) 158.55,18.2 158.25,17.9 158.25,15.95 158.7,15.5 158.7,13.3 158.15,12.75 158.15,11.3 158.7,10.75 v1@158.7,7.95
  other v1: 158.7,8.25
VBAT: D6.2 U1.19 | length 21.1
  Top Layer w0.25: v1(61.15,73.25) 61.1,72.157 61.65,71.607 U1.19@64.999,68.259
  Top Layer w0.4: v1(64.25,81.6) 64.859,80.991 D6.2@68.795,80.991
  Bottom Layer w0.4: v1(61.15,73.25) 61.1,76.55 62.95,78.4 62.95,80.3 v1(64.25,81.6)
VS: JP1.18 R71.2 | length 210.7
  Top Layer w0.4: R71.2@87.807,11.788 v1@87.807,13.193 ; v1(89.45,47.8) 104.3,47.8 107.9,51.4 120.05,51.4 121.35,52.7 130.55,52.7 135.5,57.65 159.85,57.65 162.95,54.55 182.5,54.55 185.4,51.65 190.65,51.65 190.85,51.85 192.7,51.85 192.75,51.8 208.25,51.8 209.1,50.95 217.1,50.95 217.95,50.1 v1(217.95,49.8) ; v1(217.4,70.7) v1(227.15,70.7)
  Bottom Layer w0.4: v1@87.807,13.193 89.4,14.787 89.4,47.75 v1(89.45,47.8) ; v1(217.4,70.7) 217.05,70.7 217.05,51.1 217.95,50.2 v1(217.95,49.8) ; v1(227.15,70.7) 227.175,70.675 JP1.18@233.589,70.675
  other v1: 87.8,13.5
VS: 
VS: 
VS: 
VS: 
VS: 
VS: 
VS: 
VS: 
VS: 
VS: 
VS: 
VS: 
VS: 
VS: 
VS: 
VS: 
VS: 
VS: 
VS: 
VS: 
VS: 
VS: 
VS: 
VS: 
VS: 
VS: 
VS: 
VS: 
VS: 
VS: 
XTAL1: C21.2 U1.22 Y1.1 | length 14.6
  Top Layer w0.25: C21.2@54.288,73.693 57.443,73.693 U1.22@63.938,67.198 ; Y1.1@57.3,75.942 57.35,75.892 57.35,73.693
XTAL2: C31.2 U1.23 Y1.2 | length 11.1
  Top Layer w0.25: C31.2@54.237,70.844 54.335,70.942 59.487,70.942 U1.23@63.584,66.845
pads on no net: J301.0 J301.7 JP1.3 JP1.4 JP1.15 JP1.30 JP1.31 JP1.32 JP1.42 JP4.13 JP4.14 JP4.16 JP4.17 U1.1 U1.2 U1.3 U1.4 U1.5 U1.14 U1.24 U1.44 U1.45 U1.49 U1.63 U1.68 U1.69 U1.70 U1.73 U1.81 U1.100 U3.1 U3.5 U3.6 U3.8 U3.9 U3.10 U3.11 U3.12 U3.25 U3.33 U3.38 U3.42 U3.45 U3.46 U6.1 U7.1 U7.8 U8.7 U8.8 U8.18 U8.19 U8.20 U9.1 U9.5 U9.8 U11.2 U11.4 U11.13 U12.5 U13.3 U19.4 U102.4 U102.8
copper on no net: | length 0.4
  Bottom Layer w0.5: -81.85,-36.5 -81.4,-36.5

## Polygon pours and split planes (outlines as drawn)
GND on Top Layer (hatched 90Degree grid 0.1 track 0.3, remove dead copper): 170,98.3 209.1,98.3 209.1,74 225.05,74 225.05,79.4 241.45,79.4 241.45,-2.55 39.95,-2.55 39.95,102.65 27.55,102.65 27.55,127.4 151.85,127.4 151.85,100.5 134.6,100.5 134.6,72.5 169.9,72.5 169.9,98.35
NetJP3_1 on Top Layer (hatched 90Degree grid 0.1 track 0.3, remove dead copper): -16,127.7 32.15,127.7 32.15,-2.3 -12.95,-2.3 -12.95,127.6 -12.85,127.6
+3V3 on Top Layer (hatched 90Degree grid 0.1 track 0.3, remove dead copper): 51.6,113.567 51.6,108.65 64.35,108.65 64.35,114.15 51.55,114.15 51.55,113.108 51.65,113.108
NetC103_2 on Top Layer (hatched 90Degree grid 0.1 track 0.3, remove dead copper): 193.55,121.75 193.55,104.6 202.45,104.6 202.45,102.3 207.75,102.3 207.75,121.65 193.5,121.65
GND on Top Layer (hatched 90Degree grid 0.1 track 0.3, remove dead copper): -66.93,107.95 -33.713,76.05 -46.25,63.514 -59.186,76.45 -58.236,76.45 -46.436,88.25 -45.913,88.25
NetJP3_1 on Bottom Layer (hatched 90Degree grid 0.1 track 0.3, remove dead copper): -12.75,127.15 -12.75,-3.3 33.8,-3.3 33.8,126.8 -12.75,126.8
GND on Bottom Layer (hatched 90Degree grid 0.1 track 0.3, remove dead copper): 169.85,98.25 209.1,98.25 209.1,73.95 225.1,73.95 225.1,79.05 242.5,79.05 242.5,-2.55 35,-2.55 35,102.45 27.45,102.45 27.45,127.55 151.85,127.55 151.85,100.5 134.5,100.5 134.5,72.4 169.9,72.4 169.9,98.25
+3V3 on Bottom Layer (hatched 90Degree grid 0.1 track 0.3): 60.75,64.9 72.55,76.7 84.3,64.95 84.35,64.95 72.6,53.2 72.45,53.05 60.75,64.75
GND on Bottom Layer (hatched 90Degree grid 0.1 track 0.3, remove dead copper): 80.314,112.05 87.35,105.014 94.686,112.35 88.036,119 87.878,119 87.673,119.41
+3V3 on Bottom Layer (hatched 90Degree grid 0.1 track 0.3, remove dead copper): 87.5,111.85 80.9,105.25 87.3,98.85 94,105.55 87.8,111.75 87.55,111.75
NetC103_2 on Bottom Layer (hatched 90Degree grid 0.1 track 0.3, remove dead copper): 193.55,121.7 193.55,104.65 202.45,104.65 202.45,102.3 207.75,102.3 207.75,121.7

## Keep-outs
Keep-Out Layer:
  lines w0.3: 227.4,125 41,125 41,121 30.5,121 30.5,125 -8.95,125 -8.95,110 -11.5,110 -11.5,15 -8.95,15 -8.95,0 30.5,0 30.5,104 41,104 41,0 227.5,0 227.5,13 239.95,13 ; 227.5,93 227.5,125 ; 227.55,93 239.95,93 ; 240,13 240,93 ; -6.5,103 -6.5,122 18.6,122 18.6,103 -6.5,103

## Silkscreen, mask and mechanical layers (free items; w line width, h text height)
Top Solder:
  rectangle: 110.15,105.4 127.4,121.5
Mechanical 1:
  drawing of 202 lines, arcs and shapes, not listed
Mechanical 3:
  lines w0.25: -51.44,-1.96 -49.75,-1.96 -49.75,-3.57
  lines w0.3: 91.4,92.85 91.4,99.6 119.7,99.6 119.7,92.85 ; 93.9,92.85 93.9,99.6 ; 104.4,-1.6 104.4,45.7 ; 117.2,92.85 117.2,99.6

## Text inside footprints (layer, text, board x,y; h text height)
Q2: Top Overlay "1" at 143.846,19.443 h1 r270; Top Overlay "3" at 143.846,15.115 h1 r270
Q3: Top Overlay "1" at 143.846,27.443 h1 r270; Top Overlay "3" at 143.846,23.115 h1 r270
Q4: Top Overlay "1" at 143.846,35.443 h1 r270; Top Overlay "3" at 143.846,31.115 h1 r270
Q7: Top Overlay "1" at 187.357,25.146 h1; Top Overlay "3" at 191.685,25.146 h1
Q100: Top Overlay "1" at 172.744,117.19 h1 r270; Top Overlay "3" at 172.744,112.862 h1 r270
Q101: Top Overlay "1" at 172.744,108.49 h1 r270; Top Overlay "3" at 172.744,104.162 h1 r270
U101: Top Overlay "3" at 130.978,105.214 h1 r90; Top Overlay "1" at 130.978,100.392 h1 r90
U104: Top Overlay "3" at 140.182,106.05 h1 r270; Top Overlay "1" at 140.182,110.293 h1 r270